# Altium PCB Quad FC V10.6.7.PcbDoc
Units mm, origin at the board's own origin, x right, y up, seen from the top; angles counter-clockwise.
Board outline 50 x 50 mm, 2 copper layers (Top Layer, Bottom Layer); 70 components, 50 nets, 277 pads, 3 vias.
Unrouted connection lines stored in the file: 93.
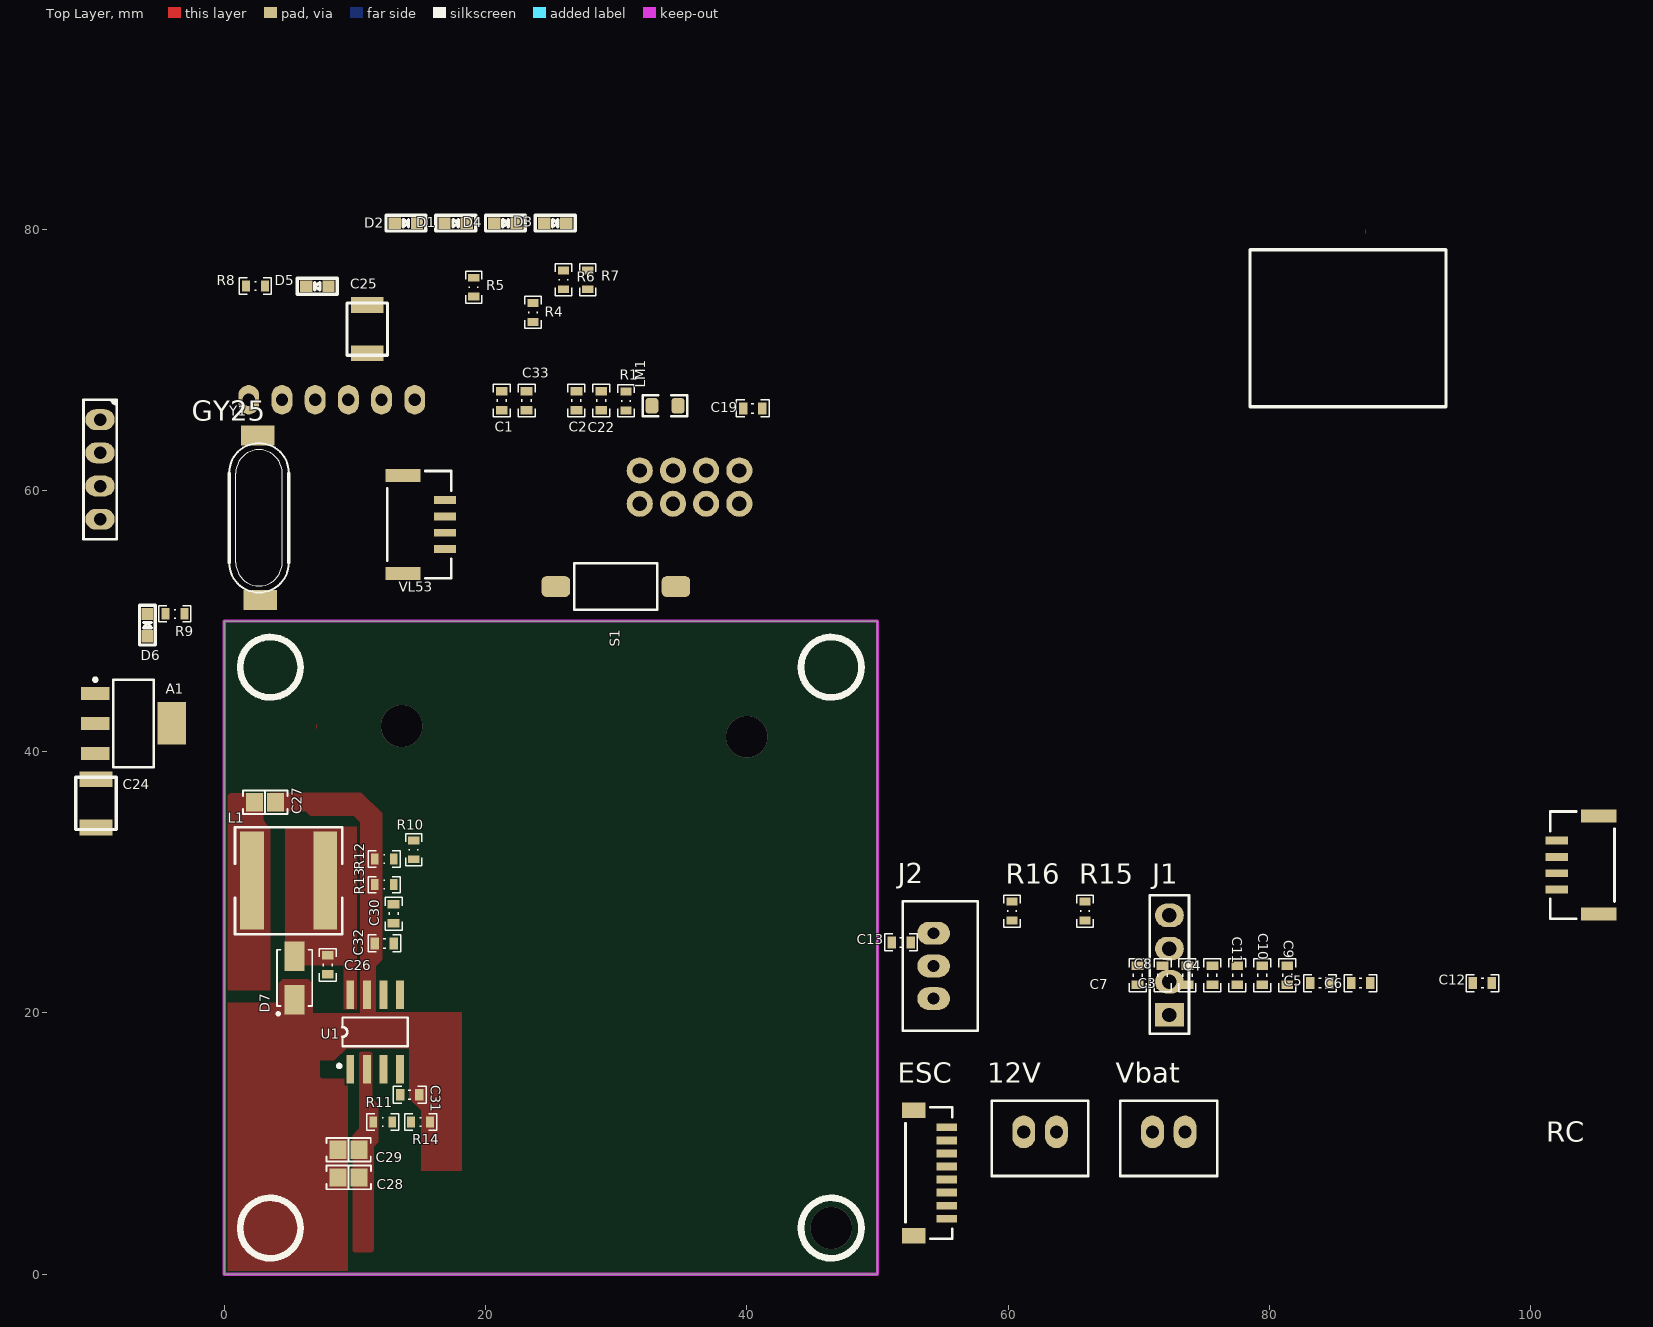
[diagram p0: Top Layer view]
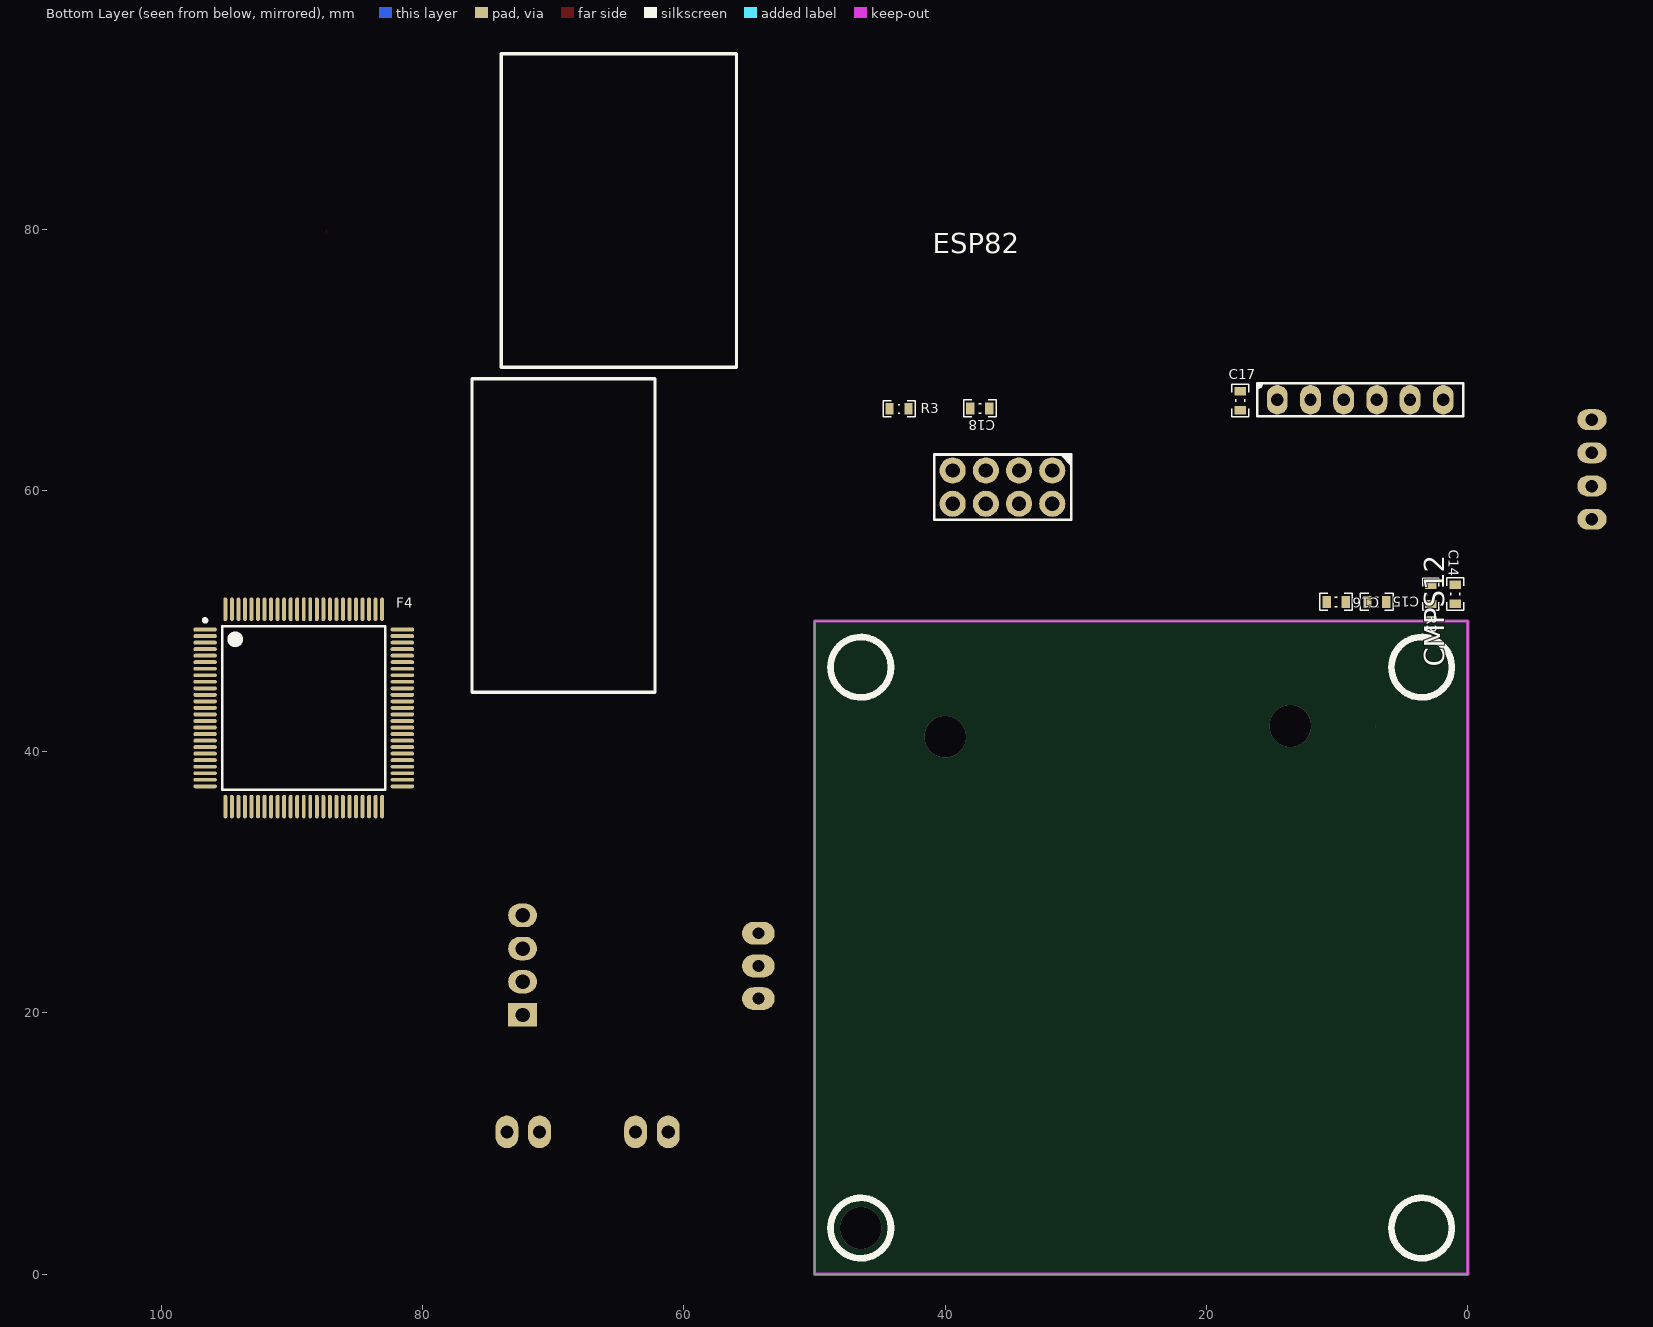
[diagram p1: Bottom Layer view, seen from below]

## Layer stack, top to bottom
Top Solder: solder mask 0.0102, Solder Resist, Dk 3.5
Top Layer: signal copper 0.0356
Dielectric 1: dielectric 0.32, FR-4, Dk 4.8
Bottom Layer: signal copper 0.0356
Bottom Solder: solder mask 0.0102, Solder Resist, Dk 3.5

## Board outline
0,0 50,0 50,50 0,50

## Design rules (kind name [scope] priority, off if disabled: settings)
Clearance [All] p1: gap=0.152 ignorepadtopadclearanceinfootprint=FALSE except(0: Arc-Hole Track-Hole SMDPad-Hole THPad-Hole Via-Hole Fill-Hole Poly-Hole Region-Hole Text-Hole)
DiffPairsRouting [All] p1: maxlimit=0.254 minlimit=0.254 mostfreqgap=0.254 toplayer_minwidth=0.381 toplayer_maxwidth=0.381 toplayer_prefwidth=0.381 bottomlayer_minwidth=0.381 bottomlayer_maxwidth=0.381 bottomlayer_prefwidth=0.381 maxuncoupledlength=12.7
HoleSize [All] p1: absolutevalues=TRUE maxlimit=10 minlimit=0.025 maxpercent=80.000 minpercent=20.000
PlaneConnect PlaneConnect_2 [All] p1: planeconnectstyle=Direct reliefexpansion=0.508 reliefentries=4 reliefconductorwidth=0.254 reliefairgap=0.254
PlaneConnect PlaneConnect_1 [All] p2: planeconnectstyle=Relief reliefexpansion=0.508 reliefentries=4 reliefconductorwidth=0.254 reliefairgap=0.254
PlaneConnect [All] p3: planeconnectstyle=Relief reliefexpansion=0.508 reliefentries=4 reliefconductorwidth=0.254 reliefairgap=0.254
PolygonConnect PolygonConnect_27 [All vs IsNamedPolygon('GND_L01_P011')] p1: connectstyle=Direct reliefconductorwidth=0.254 reliefentries=4 polygonreliefangle="90 Angle" airgapwidth=0.254
PolygonConnect PolygonConnect_26 [All vs IsNamedPolygon('NETC26_1_L01_P009')] p2: connectstyle=Direct reliefconductorwidth=0.254 reliefentries=4 polygonreliefangle="90 Angle" airgapwidth=0.254
PolygonConnect PolygonConnect_25 [All vs IsNamedPolygon('12V_L01_P010')] p3: connectstyle=Direct reliefconductorwidth=0.254 reliefentries=4 polygonreliefangle="90 Angle" airgapwidth=0.254
PolygonConnect PolygonConnect_24 [All vs IsNamedPolygon('VBAT+_L01_P008')] p4: connectstyle=Direct reliefconductorwidth=0.254 reliefentries=4 polygonreliefangle="90 Angle" airgapwidth=0.254
PolygonConnect PolygonConnect_23 [All vs IsNamedPolygon('NETC17_1_L01_P008')] p5: connectstyle=Direct reliefconductorwidth=0.254 reliefentries=4 polygonreliefangle="90 Angle" airgapwidth=0.254
PolygonConnect PolygonConnect_22 [All vs IsNamedPolygon('VBAT+_L01_P007')] p6: connectstyle=Direct reliefconductorwidth=0.254 reliefentries=4 polygonreliefangle="90 Angle" airgapwidth=0.254
PolygonConnect PolygonConnect_21 [All vs IsNamedPolygon('VBAT+_L01_P007')] p7: connectstyle=Direct reliefconductorwidth=0.254 reliefentries=4 polygonreliefangle="90 Angle" airgapwidth=0.254
PolygonConnect PolygonConnect_20 [All vs IsNamedPolygon('NONET_L01_P003')] p8: connectstyle=Direct reliefconductorwidth=0.254 reliefentries=4 polygonreliefangle="90 Angle" airgapwidth=0.254
PolygonConnect PolygonConnect_19 [All vs IsNamedPolygon('NONET_L01_P003')] p9: connectstyle=Direct reliefconductorwidth=0.254 reliefentries=4 polygonreliefangle="90 Angle" airgapwidth=0.254
PolygonConnect PolygonConnect_18 [All vs IsNamedPolygon('NONET_L01_P002')] p10: connectstyle=Direct reliefconductorwidth=0.254 reliefentries=4 polygonreliefangle="90 Angle" airgapwidth=0.254
PolygonConnect PolygonConnect_17 [All vs IsNamedPolygon('NONET_L01_P001')] p11: connectstyle=Direct reliefconductorwidth=0.254 reliefentries=4 polygonreliefangle="90 Angle" airgapwidth=0.254
PolygonConnect PolygonConnect_16 [All vs IsNamedPolygon('NETC37_1_L01_P000')] p12: connectstyle=Direct reliefconductorwidth=0.254 reliefentries=4 polygonreliefangle="90 Angle" airgapwidth=0.254
PolygonConnect PolygonConnect_15 [All vs IsNamedPolygon('GND_L02_P008')] p13: connectstyle=Direct reliefconductorwidth=0.254 reliefentries=4 polygonreliefangle="90 Angle" airgapwidth=0.254
PolygonConnect PolygonConnect_14 [All vs IsNamedPolygon('GND_L01_P007')] p14: connectstyle=Direct reliefconductorwidth=0.254 reliefentries=4 polygonreliefangle="90 Angle" airgapwidth=0.254
PolygonConnect PolygonConnect_13 [All vs IsNamedPolygon('GND_L02_P001') Or IsNamedPolygon('NONET_L02_P004')] p15: connectstyle=Direct reliefconductorwidth=0.254 reliefentries=4 polygonreliefangle="90 Angle" airgapwidth=0.254
PolygonConnect PolygonConnect_12 [All vs IsNamedPolygon('GND_L01_P006')] p16: connectstyle=Direct reliefconductorwidth=0.254 reliefentries=4 polygonreliefangle="90 Angle" airgapwidth=0.254
PolygonConnect PolygonConnect_11 [All vs IsNamedPolygon('GND_L01_P005')] p17: connectstyle=Direct reliefconductorwidth=0.254 reliefentries=4 polygonreliefangle="90 Angle" airgapwidth=0.254
PolygonConnect PolygonConnect_10 [All vs IsNamedPolygon('NETC37_1_L01_P002')] p18: connectstyle=Direct reliefconductorwidth=0.254 reliefentries=4 polygonreliefangle="90 Angle" airgapwidth=0.254
PolygonConnect PolygonConnect_9 [All vs IsNamedPolygon('MP1584-FB_L01_P005')] p19: connectstyle=Direct reliefconductorwidth=0.254 reliefentries=4 polygonreliefangle="90 Angle" airgapwidth=0.254
PolygonConnect PolygonConnect_8 [All vs IsNamedPolygon('GND_L02_P001')] p20: connectstyle=Direct reliefconductorwidth=0.254 reliefentries=4 polygonreliefangle="90 Angle" airgapwidth=0.254
PolygonConnect PolygonConnect_7 [All vs IsNamedPolygon('MP1584-FB_L01_P005')] p21: connectstyle=Direct reliefconductorwidth=0.254 reliefentries=4 polygonreliefangle="90 Angle" airgapwidth=0.254
PolygonConnect PolygonConnect_6 [All vs IsNamedPolygon('MP1584-FB_L01_P005')] p22: connectstyle=Direct reliefconductorwidth=0.254 reliefentries=4 polygonreliefangle="90 Angle" airgapwidth=0.254
PolygonConnect PolygonConnect_5 [All vs IsNamedPolygon('NONET_L02_P004')] p23: connectstyle=Direct reliefconductorwidth=0.254 reliefentries=4 polygonreliefangle="90 Angle" airgapwidth=0.254
PolygonConnect PolygonConnect_4 [All vs IsNamedPolygon('NETC34_1_L01_P003')] p24: connectstyle=Direct reliefconductorwidth=0.254 reliefentries=4 polygonreliefangle="90 Angle" airgapwidth=0.254
PolygonConnect PolygonConnect_3 [All vs IsNamedPolygon('NETC34_2_L01_P002')] p25: connectstyle=Direct reliefconductorwidth=0.254 reliefentries=4 polygonreliefangle="90 Angle" airgapwidth=0.254
PolygonConnect PolygonConnect_2 [All vs IsNamedPolygon('GND_L02_P001')] p26: connectstyle=Direct reliefconductorwidth=0.254 reliefentries=4 polygonreliefangle="90 Angle" airgapwidth=0.254
PolygonConnect PolygonConnect_1 [All vs IsNamedPolygon('VBAT+_L01_P000')] p27: connectstyle=Direct reliefconductorwidth=0.254 reliefentries=4 polygonreliefangle="90 Angle" airgapwidth=0.254
PolygonConnect [All] p28: connectstyle=Relief reliefconductorwidth=0.254 reliefentries=4 polygonreliefangle="90 Angle" airgapwidth=0.254
RoutingVias [All] p1: holewidth=0.3 width=0.4 viastyle="Through Hole" minholewidth=0.254 minwidth=0.254 maxholewidth=5 maxwidth=5
SilkToSilkClearance [All] p1: silktosilkclearance=0.152
SolderMaskExpansion [IsVia  and not Locked] p1: expansion=0.051 istentingtop=TRUE
Width 12V [InNet('12V')] p1: maxlimit=1.016 minlimit=0.254 preferedwidth=0.508
Width 3V3 [InNet('3V3')] p2: maxlimit=1.016 minlimit=0.254 preferedwidth=0.508
Width [All] p3: maxlimit=1.524 minlimit=0.152 preferedwidth=0.508
26 further rules are at their usual default settings.

## Classes and differential pairs
component class "Quad FC power V10.6": 12V A1 C24 C25 C26 C27 C28 C29 C30 C31 C32 D5 D6 D7 ESC L1 R8 R9 R10 R11 R12 R13 R14 U1 Vbat
component class "Quad FC V10.6": -- C1 C2 C3 C4 C5 C6 C7 C8 C9 C10 C11 C12 C13 C14 C15 C16 C17 C18 C19 C22 C33 CMPS12 D1 D2 D3 D4 ESP82 F4 GY25 J1 J2 LM1 R1 R2 R3 R4 R5 R6 R7 R15 R16 RC S1 VL53 Y1
differential pair F407_OSC: +F407_OSC_P -F407_OSC_N

## Components (designator, comment, footprint, x,y, rotation, side; value= is the part's Value field where it differs from the comment)
12V "Jetson Power" "JST XH B2B-XH-A" 62.45,10.9 r0 top
A1 "3.3V linear regulator" SOT230P700X180-4N -6.94,42.16 r0 top
C1 "100nF" CAP0603 21.238,66.873 r90 top
C2 "1uF" CAP0603 26.962,66.873 r90 top
C3 "100nF" CAP0603 73.732,22.89 r270 top
C4 "100nF" CAP0603 75.64,22.89 r270 top
C5 "100nF" CAP0603 83.872,22.29 r0 top
C6 "100nF" CAP0603 86.98,22.29 r0 top
C7 "100nF" CAP0603 69.916,22.89 r90 top
C8 "1uF" CAP0603 71.824,22.89 r90 top
C9 "100nF" CAP0603 81.364,22.89 r90 top
C10 "4.7uF" CAP0603 79.456,22.89 r90 top
C11 "100nF" CAP0603 77.548,22.89 r90 top
C12 "100nF" CAP0603 96.304,22.29 r180 top
C13 "100nF" CAP0603 51.808,25.398 r180 top
C14 "100nF" CAP0603 0.954,52.062 r90 bottom
C15 "10pF" CAP0603 6.975,51.462 r180 bottom
C16 "10pF" CAP0603 10.083,51.462 r0 bottom
C17 "2.2uF" CAP0603 17.422,66.873 r270 bottom
C18 "2.2uF" CAP0603 37.344,66.273 r0 bottom
C19 "100nF" CAP0603 40.452,66.273 r180 top
C22 "100nF" CAP0603 28.87,66.873 r270 top
C24 "10uF" MY_CAP_SMD-B -9.81,36.04 r270 top value=3300u
C25 "100uF" MY_CAP_SMD-B 10.95,72.34 r90 top value=3300u
C26 "100nF" CAP0603 7.93,23.68 r270 top
C27 "10 µF" "CAP 0805_2012" 3.14,36.12 r180 top
C28 "10 µF" "CAP 0805_2012" 9.53,7.41 r0 top
C29 "10 µF" "CAP 0805_2012" 9.52,9.53 r0 top
C30 "1nF" CAP0603 12.97,27.6 r90 top
C31 "8.2nF" CAP0603 14.2,13.74 r0 top
C32 "10pF" CAP0603 12.26,25.32 r180 top
C33 "100nF" CAP0603 23.146,66.873 r90 top
CMPS12 "CMPS12" "SAMTEC SSW-106-03-T-S" 8.234,66.943 r180 bottom
D1 "LED" "0603 - LED" 17.721,80.457 r0 top
D2 "LED" "0603 - LED" 13.911,80.457 r0 top
D3 "LED" "0603 - LED" 25.341,80.457 r0 top
D4 "LED" "0603 - LED" 21.531,80.457 r0 top
D5 "LED" "0603 - LED" 7.13,75.63 r180 top
D6 "LED" "0603 - LED" -5.872,49.687 r90 top
D7 "1n5822" DIOM4226X244N 5.39,22.69 r90 top
ESC "ESC" "JST BM08B-SRSS-TB" 54.05,7.75 r90 top
ESP82 "ESP82" "HARWIN M20-7830445" 35.62,60.25 r270 bottom
F4 "STM32F407VGT6" STM-LQFP100_N 89.1,43.35 r180 bottom
GY25 "GY25" "SAMTEC SSW-104-03-T-S" -9.5,61.6 r270 top
J1 "Programming Pin" "HEADER 4X1" 72.35,19.85 r90 top
J2 "Jetson Uart connector" "JST XH B3B-XH-A" 54.3,23.6 r90 top
L1 "10 µH" "TAIYO YUDEN NRS8030" 4.93,30.13 r180 top
LM1 "10uH" 0805L 33.736,66.473 r180 top value=FB805
R1 "0" RES0603 30.753,66.848 r90 top
R2 "1K" RES0603 2.837,52.037 r90 bottom
R3 "1K" RES0603 43.535,66.248 r180 bottom
R4 "1K" RES0603 23.63,73.62 r270 top
R5 "1K" RES0603 19.1,75.555 r270 top
R6 "1K" RES0603 25.971,76.117 r270 top
R7 "1K" RES0603 27.829,76.117 r270 top
R8 "1K" RES0603 2.39,75.64 r180 top
R9 "1K" RES0603 -3.772,50.557 r0 top
R10 "10.2k" RES0603 14.51,32.49 r90 top
R11 "0.732k" RES0603 12.14,11.65 r180 top
R12 "0.732k" RES0603 12.25,31.79 r0 top
R13 "36.5K" RES0603 12.25,29.82 r0 top value=36.5k
R14 "0.732k" RES0603 15.035,11.65 r180 top
R15 "0" RES0603 65.9,27.8 r90 top
R16 "0" RES0603 60.3,27.8 r90 top
RC "Radio Controller" "JST SM04B-GHS-TB" 103.875,31.325 r270 top
S1 "FSMSMTR" "TE FSMSMTR" 29.984,52.64 r90 top
U1 "TPS54331" SO8 11.56,18.55 r0 top
Vbat "FC power" "JST XH B2B-XH-A" 72.3,10.9 r0 top
VL53 "VL53L0" "JST SM04B-GHS-TB" 15.02,57.38 r90 top
Y1 "CRYSTAL_SMD" "My_Crystal - SMD" 2.667,57.901 r90 top

## Footprints (in the part's own frame and the unit in brackets; to place one, negate y for a bottom-side part, rotate by r counter-clockwise, add the part's x,y. Pads: shape width x height; smd on the part's side, far side on the other; paste and mask are expansions set on the pad)
"0603 - LED" [mil]
  rect 37x35 smd: 1(-33.5,0) 2(33.5,0)
  silkscreen extent -60,-24 60,24, body extent -32,-16 32,16, height 43
0805L [mm] ",0805, 2012, 200X130"
  rrect50% 1x1.2 smd mask+0.075: 1(-1,0) 2(1,0)
  Top Layer pour cut-out: -0.5,0.8 0.5,0.8 0.5,-0.8 -0.5,-0.8
  silkscreen extent -1.7,-0.8 1.7,0.8, body extent -1,-0.6 1,0.6, height 0.95
CAP0603 [mm] "Chip Capacitor, 2-Leads, Body 1/60x0/80mm, IPC Medium Density DESIGNER:ABBAS BASEREH"
  rect 0.65x0.9 smd: 1(-0.725,0) 2(0.725,0)
  silkscreen extent -1.25,-0.65 1.25,0.65, body extent -0.82,-0.43 0.82,0.43, height 0.4
"CAP 0805_2012" [mm] "Chip Capacitor, 2-Leads, Body 2.00x1.20mm, IPC Medium Density"
  rect 1.3x1.4 smd: 1(-0.8,0) 2(0.8,0)
  silkscreen extent -1.7,-0.9 1.7,0.9, body extent -1,-0.64 1,0.64, height 1.26
DIOM4226X244N [mm]
  rect 2.26x1.51 smd: 1(-1.67,0) 2(1.67,0)
  silkscreen extent -2.85,-1.35 2.15,1.35, body extent -2.6,-1.36 2.6,1.36, height 1.19
"HARWIN M20-7830445" [mm] "2.54mm DIL PC TAIL PIN HEADER ASSEMBLY"
  round 2 hole 1.1: 1(-1.27,3.81) 2(-1.27,1.27) 3(-1.27,-1.27) 4(-1.27,-3.81) 5(1.27,-3.81) 6(1.27,-1.27) 7(1.27,1.27) 8(1.27,3.81)
  silkscreen extent -2.5,-5.23 2.5,5.27, body extent -2.52,-5.28 2.52,5.28, height 8.5
"HEADER 4X1" [mm]
  rect 1.8x2.2 hole 1.1: 1(0,0)
  oval 1.8x2.2 hole 1.1: 2(2.54,0) 3(5.08,0) 4(7.62,0)
  silkscreen extent -1.43,-1.5 9.18,1.5, body extent -1.19,-1.22 8.97,1.32, height 8.38
"JST BM08B-SRSS-TB" [mm] "1.0mm pitch/Disconnectable Crimp style connector"
  rect 0.6x1.55 smd: 1(-3.5,-1.262) 2(-2.5,-1.262) 3(-1.5,-1.262) 4(-0.5,-1.262) 5(0.5,-1.262) 6(1.5,-1.262) 7(2.5,-1.262) 8(3.5,-1.262)
  rect 1.2x1.8 smd: M(-4.8,1.262) M(4.8,1.262)
  silkscreen extent -5.03,-1.68 5.03,1.91, body extent -5,-1.69 5,1.91, height 4.32
"JST SM04B-GHS-TB" [mm] "1.25mm pitch/Disconnectable Crimp style connectors"
  rect 0.6x1.7 smd: 1(-1.875,-1.875) 2(-0.625,-1.875) 3(0.625,-1.875) 4(1.875,-1.875)
  rect 1x2.7 smd: M(-3.75,1.325) M(3.75,1.325)
  silkscreen extent -4.1,-2.37 4.1,2.54, body extent -4.12,-2.31 4.13,2.54, height 4.35
"JST XH B2B-XH-A" [mm]
  oval 1.75x2.5 hole 1: 1(-1.25,0) 2(1.25,0)
  silkscreen extent -3.7,-3.38 3.7,2.38, body extent -3.7,-3.38 3.7,2.38, height 7
"JST XH B3B-XH-A" [mm]
  oval 1.75x2.5 hole 0.9: 1(-2.5,0) 2(0,0) 3(2.5,0)
  silkscreen extent -4.95,-3.38 4.95,2.38, body extent -4.95,-3.38 4.95,2.38, height 7
MY_CAP_SMD-B [mm] "3.1X4"
  rect 1.2x2.5 smd: +(-1.845,0) -(1.845,0)
  silkscreen extent -2,-1.55 2,1.55, body extent -1.85,-1.41 1.85,1.41, height 2.14
"My_Crystal - SMD" [mil]
  rect 60x100 smd: 1(-247.06,-3.93) 2(248.03,3.94)
  silkscreen extent -225,-90 225,90, body extent -247,-98 245,91, height 154
RES0603 [mm] "Chip Resistor, 2-Leads, Body 1/60x0/80mm, IPC Medium Density DESIGNER:ABBAS BASEREH"
  rect 0.6x0.85 smd: 1(-0.725,0) 2(0.725,0)
  silkscreen extent -1.23,-0.63 1.23,0.62, body extent -0.82,-0.43 0.82,0.43, height 0.4
"SAMTEC SSW-104-03-T-S" [mm]
  oval 1.6x2.25 hole 0.95: 1(-3.81,0) 2(-1.27,0) 3(1.27,0) 4(3.81,0)
  silkscreen extent -5.34,-1.27 5.34,1.27, body extent -5.33,-1.21 5.33,1.21, height 8.51
"SAMTEC SSW-106-03-T-S" [mm]
  oval 1.6x2.25 hole 0.95: 1(-6.35,0) 2(-3.81,0) 3(-1.27,0) 4(1.27,0) 5(3.81,0) 6(6.35,0)
  silkscreen extent -7.88,-1.27 7.88,1.27, body extent -7.87,-1.21 7.87,1.21, height 8.51
SO8 [mm]
  rect 0.6x2.2 smd: 1(-1.905,-2.854) 2(-0.635,-2.854) 3(0.635,-2.854) 4(1.905,-2.854) 5(1.905,2.854) 6(0.635,2.854) 7(-0.635,2.854) 8(-1.905,2.854)
  silkscreen extent -2.88,-2.72 2.5,1.1, body extent -2.46,-2.79 2.44,2.98, height 1.45
SOT230P700X180-4N [mm] "SOT223, 4-Leads, Body 6.50x7.00mm (avg), Pitch 2.30mm, IPC Medium Density"
  rect 2.15x1 smd: 1(-2.925,2.3) 2(-2.925,0) 3(-2.925,-2.3)
  rect 2.15x3.25 smd: 4(2.925,0)
  silkscreen extent -3.05,-3.35 1.55,3.47, body extent -1.85,-3.35 1.85,3.35, height 1.8
STM-LQFP100_N [mm] "Thin QFP, 100-Leads, Body 14x14mm, Pitch 0.5mm, IPC Medium Density"
  oval 1.8x0.3 smd: 1(-7.55,6) 2(-7.55,5.5) 3(-7.55,5) 4(-7.55,4.5) 5(-7.55,4) 6(-7.55,3.5) 7(-7.55,3) 8(-7.55,2.5) 9(-7.55,2) 10(-7.55,1.5) 11(-7.55,1) 12(-7.55,0.5) 13(-7.55,0) 14(-7.55,-0.5) 15(-7.55,-1) 16(-7.55,-1.5) 17(-7.55,-2) 18(-7.55,-2.5) 19(-7.55,-3) 20(-7.55,-3.5) 21(-7.55,-4) 22(-7.55,-4.5) 23(-7.55,-5) 24(-7.55,-5.5) 25(-7.55,-6) 51(7.55,-6) 52(7.55,-5.5) 53(7.55,-5) 54(7.55,-4.5) 55(7.55,-4) 56(7.55,-3.5) 57(7.55,-3) 58(7.55,-2.5) 59(7.55,-2) 60(7.55,-1.5) 61(7.55,-1) 62(7.55,-0.5) 63(7.55,0) 64(7.55,0.5) 65(7.55,1) 66(7.55,1.5) 67(7.55,2) 68(7.55,2.5) 69(7.55,3) 70(7.55,3.5) 71(7.55,4) 72(7.55,4.5) 73(7.55,5) 74(7.55,5.5) 75(7.55,6)
  oval 0.3x1.8 smd: 26(-6,-7.55) 27(-5.5,-7.55) 28(-5,-7.55) 29(-4.5,-7.55) 30(-4,-7.55) 31(-3.5,-7.55) 32(-3,-7.55) 33(-2.5,-7.55) 34(-2,-7.55) 35(-1.5,-7.55) 36(-1,-7.55) 37(-0.5,-7.55) 38(0,-7.55) 39(0.5,-7.55) 40(1,-7.55) 41(1.5,-7.55) 42(2,-7.55) 43(2.5,-7.55) 44(3,-7.55) 45(3.5,-7.55) 46(4,-7.55) 47(4.5,-7.55) 48(5,-7.55) 49(5.5,-7.55) 50(6,-7.55) 76(6,7.55) 77(5.5,7.55) 78(5,7.55) 79(4.5,7.55) 80(4,7.55) 81(3.5,7.55) 82(3,7.55) 83(2.5,7.55) 84(2,7.55) 85(1.5,7.55) 86(1,7.55) 87(0.5,7.55) 88(0,7.55) 89(-0.5,7.55) 90(-1,7.55) 91(-1.5,7.55) 92(-2,7.55) 93(-2.5,7.55) 94(-3,7.55) 95(-3.5,7.55) 96(-4,7.55) 97(-4.5,7.55) 98(-5,7.55) 99(-5.5,7.55) 100(-6,7.55)
  silkscreen extent -7.68,-6.25 6.25,6.82, body extent -7,-7 7,7, height 1.6
"TAIYO YUDEN NRS8030" [mm] "Precision Wire Wound Inductor, 2-Leads, Body 8.00x8.00mm, IPC Medium Density"
  rect 1.8x7.5 smd: 1(-2.8,0) 2(2.8,0)
  silkscreen extent -4.1,-4.1 4.1,4.1, body extent -4,-4 4,4, height 3
"TE FSMSMTR" [mm]
  rrect50% 1.6x2.19 smd: 1(0,4.595) 2(0,-4.595)
  silkscreen extent -1.78,-3.17 1.78,3.17, body extent -1.75,-4.98 1.75,4.98, height 4.42

## Part data
12V Vbat: library part B2B-XH-A(LF)(SN), "CONN HEADER VERT 2POS 2.5MM", Current Rating (Amps)=3A, Insulation Color=Natural, Manufacturer="JST Sales America Inc.", Material Flammability Rating="UL94 V-0", Operating Temperature="-25°C ~ 85°C", Supplier Part Number 1=455-2247-ND, Voltage Rating=250V, ComponentLink1Description=Datasheet, ComponentLink1URL=http://www.jst-mfg.com/product/pdf/eng/eXH.pdf, ComponentLink2Description="DigiKey Link", ComponentLink2URL=http://digikey.com/product-detail/en/jst-sales-america-inc/B2B-XH-A-LF-SN/455-2247-ND/1651045, Connector Type=Header, Contact Finish - Mating=Tin, Contact Finish - Post=Tin, Contact Length - Post="0.134\" (3.40mm)", Contact Material=Brass, Contact Shape=Square, Contact Type="Male Pin", Fastening Type="Detent Lock", Insulation Height="0.276\" (7.00mm)", Insulation Material="Polyamide (PA66), Nylon 6/6", LastUpdated="1/12/2020 11:46:08 PM", Lifecycle Status=Active, Minimum Order=1, Mounting Type="Through Hole", Number of Positions=2, Number of Positions Loaded=All, Number of Rows=1, Packaging=Bulk, Part Number=B2B-XH-A(LF)(SN), Part Status=Active, partid=67, Pitch - Mating="0.098\" (2.50mm)", Price=0.15, Series=XH, Shrouding="Shrouded - 4 Wall", Style="Board to Cable/Wire", Supplier 1=DigiKey, Termination="Press-Fit, Solder"
A1: library part ams1117
C1 C2 C3 C4 C5 C6 C7 C8 C9 C10 C11 C12 C13 C14 C15 C16 C17 C18 C19 C22 C26 C30 C31 C32 C33: library part "CAP SMD PACKAGE", "F407VET6 Power CAP", Data=2017-3-10, Desc.="CAP SMD TOTAL PACKAGES", Designer="Abbas Basereh"
C24 C25: library part CAP_TANTAL_B, "3.5X2.8MM"
C27 C28 C29: library part GRM21BR61H106KE43K, "CAP CER 10UF 50V X5R 0805", Device Package="0805 (2012 Metric)", Manufacturer="Murata Electronics", Operating Temperature="-55°C ~ 85°C", Supplier Part Number 1=490-GRM21BR61H106KE43KCT-ND, Temperature Coefficient=X5R, Tolerance=±10%, Voltage - Rated=50V, Applications="General Purpose", Capacitance="10 µF", ComponentLink1Description=Datasheet, ComponentLink1URL=https://search.murata.co.jp/Ceramy/image/img/A01X/G101/ENG/GRM21BR61H106KE43-01A.pdf, ComponentLink2Description="DigiKey Link", ComponentLink2URL=https://www.digikey.com/en/products/detail/murata-electronics/GRM21BR61H106KE43K/15191954, LastUpdated="2/9/2024 8:15:01 PM", Lifecycle Status=Active, Minimum Order=1, Mounting Type="Surface Mount, MLCC", Package / Case="0805 (2012 Metric)", Packaging=TapeAndReel, Part Number=GRM21BR61H106KE43K, Part Status=Active, partid=40508, Price=0.05, Series=GRM, Size / Dimension="0.079\" L x 0.049\" W (2.00mm x 1.25mm)", Supplier 1=DigiKey, Thickness (Max)="0.057\" (1.45mm)"
CMPS12: library part SSW-106-03-T-S, "CONN RCPT 6POS 0.1 TIN PCB", Current Rating (Amps)="5.7A per Contact", Insulation Color=Black, Manufacturer="Samtec Inc.", Material Flammability Rating="UL94 V-0", Operating Temperature="-55°C ~ 105°C", Supplier Part Number 1=SAM8865-ND, ComponentLink1Description=Datasheet, ComponentLink1URL=http://suddendocs.samtec.com/prints/ssw-s.pdf, ComponentLink2Description="DigiKey Link", ComponentLink2URL=https://www.digikey.com/en/products/detail/samtec-inc/SSW-106-03-T-S/1790202, Connector Type=Receptacle, Contact Finish - Mating=Tin, Contact Finish - Post=Tin, Contact Length - Post="0.394\" (10.00mm)", Contact Type=Forked, Fastening Type=Push-Pull, Insulation Height="0.335\" (8.51mm)", LastUpdated="6/21/2022 3:09:22 PM", Lifecycle Status=Active, Minimum Order=1, Mounting Type="Through Hole", Number of Positions=6, Number of Positions Loaded=All, Number of Rows=1, Packaging=Bulk, Part Number=SSW-106-03-T-S, Part Status=Active, Pitch - Mating="0.100\" (2.54mm)", Price=0.55, Series=SSW, Style="Board to Board or Cable", Supplier 1=DigiKey, Termination=Solder
D1 D2 D3 D4 D5 D6: "Led", LatestRevisionDate=08-Jul-2005, LatestRevisionNote="Mech Layer 1 removed.", PackageReference=LED-0, Published=8-Jun-2000, Publisher="Altium Limited"
D7: library part "1n5822 SMD", "Schottky Rectifiers", Manufacturer="ON Semiconductor/Fairchild", Data=16-12-2016, Designer="Abbas Basereh", Link=https://www.aliexpress.com/item/Free-shipping-100pcs-1n5822-sma-smd-do-214ac-Schottky-diode-ss34/32337482329.html?spm=2114.01010208.3.1.zLZDsP&ws_ab_test=searchweb0_0,searchweb201602_4_10065_10068_10084_10083_10080_10082_10081_10060_10061_10062_10056_10055_10054_10059_10099_10078_10079_427_10073_10103_10102_10096_10052_10050_10051,searchweb201603_4&btsid=6e50dc92-ac69-45bc-a19e-209af19ce602, Part. No=SS34
ESC: library part BM08B-SRSS-TBT(LF)(SN), "CONN HEADER SMD 8POS 1MM", Part Number=BM08B-SRSS-TBT(LF)(SN)
ESP82: library part M20-7830442, "CONN RCPT 8POS 0.1 GOLD PCB", Current Rating (Amps)=3A, Insulation Color=Black, Manufacturer="Harwin Inc.", Material Flammability Rating="UL94 V-0", Operating Temperature="-40°C ~ 105°C", Supplier Part Number 1=952-1789-ND, ComponentLink1Description=Datasheet, ComponentLink1URL=https://cdn.harwin.com/pdfs/C001XX_M20_Series_Connectors.pdf, ComponentLink2Description="DigiKey Link", ComponentLink2URL=http://digikey.com/product-detail/en/harwin-inc/M20-7830442/952-1789-ND/3727758, Connector Type=Receptacle, Contact Finish - Mating=Gold, Contact Finish - Post=Tin, Contact Finish Thickness - Mating=Flash, Contact Length - Post="0.118\" (3.00mm)", Contact Type="Female Socket", Fastening Type=Push-Pull, Insulation Height="0.335\" (8.51mm)", LastUpdated="9/21/2022 7:04:26 PM", Lifecycle Status=Active, Mated Stacking Heights="11.04mm, 12.63mm", Minimum Order=1, Mounting Type="Through Hole", Number of Positions=8, Number of Positions Loaded=All, Number of Rows=2, Packaging=Tube, Part Number=M20-7830442, Part Status=Active, Pitch - Mating="0.100\" (2.54mm)", Price=1.36, Row Spacing - Mating="0.100\" (2.54mm)", Series=M20, Style="Board to Board or Cable", Supplier 1=DigiKey, Termination=Solder
F4: "ARM Cortex-M4 32-bit MCU+FPU, 210 DMIPS, 1024 kB Flash, 192 kB Internal RAM, 82 I/Os, 100-pin LQFP, -40 to 85 degC, Tray", I/Os (High Current)=82, Manufacturer=STMicroelectronics, Operating Frequency(F) (Processor speed) (MHz)=168, Supplier Part Number 1=497-11605-ND, Supply Voltage(Vcc) max (V)=3.6, Supply Voltage(Vcc) min (V)=1.8, ComponentLink1Description="Manufacturer URL", ComponentLink1URL=http://www.st.com/web/en/home.html, ComponentLink2Description=Datasheet, ComponentLink2URL=http://www.st.com/st-web-ui/static/active/en/resource/technical/document/datasheet/DM00037051.pdf, ComponentLink3Description="Package Specification", ComponentLink3URL=http://www.st.com/st-web-ui/static/active/en/resource/technical/document/data_brief/DM00071938.pdf, Core="ARM Cortex-M4", D/A Converter=2x12-bit, DatasheetVersion="Rev. 4", FLASH Size (Prog) (kB)=1024, Internal RAM Size (kB)=192, Mounting Technology="Surface Mount", PackageDescription="100-Pin Low Profile Quad Flat Package, 14 x 14 mm Body, 0.5 mm Pitch", PackageReference=LQFP100, PackageVersion="Rev. 1, 06/2013", Packing=Tray, PartNumber=STM32F407VGT6, Supplier 1=Digi-Key, Supplier 2=Farnell, Supplier 3=Newark, Supplier 4=Mouser, Supplier Part Number 2=2064368, Supplier Part Number 3=73T2333, Supplier Part Number 4=511-STM32F407VGT6
GY25: library part SSW-104-03-T-S, "CONN RCPT 4POS 0.1 TIN PCB", Current Rating (Amps)="5.7A per Contact", Insulation Color=Black, Manufacturer="Samtec Inc.", Material Flammability Rating="UL94 V-0", Operating Temperature="-55°C ~ 105°C", Supplier Part Number 1=SSW-104-03-T-S-ND, ComponentLink2Description="DigiKey Link", ComponentLink2URL=http://digikey.com/product-detail/en/samtec-inc/SSW-104-03-T-S/SSW-104-03-T-S-ND/7874034, Connector Type=Receptacle, Contact Finish - Mating=Tin, Contact Finish - Post=Tin, Contact Type=Forked, Fastening Type=Push-Pull, LastUpdated="6/21/2022 3:08:52 PM", Lifecycle Status=Active, Minimum Order=1, Mounting Type="Through Hole", Number of Positions=4, Number of Positions Loaded=All, Number of Rows=1, Packaging=Bulk, Part Number=SSW-104-03-T-S, Part Status=Active, Price=0.83, Series=SSW, Style="Board to Board or Cable", Supplier 1=DigiKey, Termination=Solder
J1: library part Header4X1
J2: library part B3B-XH-A(LF)(SN), "CONN HEADER VERT 3POS 2.5MM", Current Rating (Amps)=3A, Insulation Color=Natural, Manufacturer="JST Sales America Inc.", Material Flammability Rating="UL94 V-0", Operating Temperature="-25°C ~ 85°C", Supplier Part Number 1=455-2248-ND, Voltage Rating=250V, ComponentLink1Description=Datasheet, ComponentLink1URL=http://www.jst-mfg.com/product/pdf/eng/eXH.pdf, ComponentLink2Description="DigiKey Link", ComponentLink2URL=http://digikey.com/product-detail/en/jst-sales-america-inc/B3B-XH-A-LF-SN/455-2248-ND/1651046, Connector Type=Header, Contact Finish - Mating=Tin, Contact Finish - Post=Tin, Contact Length - Post="0.134\" (3.40mm)", Contact Material=Brass, Contact Shape=Square, Contact Type="Male Pin", Fastening Type="Detent Lock", Insulation Height="0.276\" (7.00mm)", Insulation Material="Polyamide (PA66), Nylon 6/6", LastUpdated="1/12/2020 11:46:22 PM", Lifecycle Status=Active, Minimum Order=1, Mounting Type="Through Hole", Number of Positions=3, Number of Positions Loaded=All, Number of Rows=1, Packaging=Bulk, Part Number=B3B-XH-A(LF)(SN), Part Status=Active, partid=68, Pitch - Mating="0.098\" (2.50mm)", Price=0.19, Series=XH, Shrouding="Shrouded - 4 Wall", Style="Board to Cable/Wire", Supplier 1=DigiKey, Termination="Press-Fit, Solder"
L1: library part NRS8030T100MJGJV, "FIXED IND 10UH 3A 42.9 MOHM SMD", Current - Saturation=2.4A, Current Rating (Amps)="3 A", DC Resistance (DCR)="42.9mOhm Max", Device Package=Nonstandard, Frequency - Self Resonant=27MHz, Inductance Frequency - Test="100 kHz", Manufacturer="Taiyo Yuden", Operating Temperature="-40°C ~ 125°C", Ratings=AEC-Q200, Supplier Part Number 1=587-3647-1-ND, Tolerance=±20%, ComponentLink1Description=Datasheet, ComponentLink1URL="https://ds.yuden.co.jp/TYCOMPAS/ut/detail?pn=NRS8030T100MJGJV  &u=M", ComponentLink2Description="DigiKey Link", ComponentLink2URL=https://www.digikey.com/en/products/detail/taiyo-yuden/NRS8030T100MJGJV/4693986, Height - Seated (Max)="0.118\" (3.00mm)", Inductance="10 µH", LastUpdated="2/8/2024 9:55:48 PM", Lifecycle Status=Active, Material - Core=Ferrite, Minimum Order=1, Mounting Type="Surface Mount", Package / Case=Nonstandard, Packaging=TapeAndReel, Part Number=NRS8030T100MJGJV, Part Status=Active, partid=5482, Price=0.23, Series="NR, S Type", Shielding=Shielded, Size / Dimension="0.315\" L x 0.315\" W (8.00mm x 8.00mm)", Supplier 1=DigiKey, Type="Drum Core, Wirewound"
LM1: library part "L SMA 0.25W", "Inductor", Code_IEC=1005, Code_JEITA=0402, LatestRevisionDate=29-May-2009, LatestRevisionNote="IPC-7351 Footprint Added.", PackageDescription="Chip Inductor", PackageReference=0402-A, Published=8-Jun-2000, Publisher="Altium Limited"
R1 R2 R3 R4 R5 R6 R7 R8 R9 R10 R11 R12 R13 R14 R15 R16: library part "RES SMD PACKAGE", "TOTAL SMD RESISTOR PACK", Data=2017-3-10, Desc.="RES SMD PAKAGES", Designer="Abbas Basereh"
RC VL53: library part SM04B-GHS-TB(LF)(SN)-, "CONN HEADER SMD R/A 4POS 1.25MM", Current Rating (Amps)=1A, Insulation Color=Natural, Manufacturer="JST Sales America Inc.", Material Flammability Rating="UL94 V-0", Operating Temperature="-25°C ~ 85°C", Supplier Part Number 1=455-1566-1-ND, Voltage Rating=50V, ComponentLink1Description=Datasheet, ComponentLink1URL=http://www.jst-mfg.com/product/pdf/eng/eGH.pdf, ComponentLink2Description="DigiKey Link", ComponentLink2URL=http://digikey.com/product-detail/en/jst-sales-america-inc/SM04B-GHS-TB-LF-SN/455-1566-1-ND/807834, Connector Type=Header, Contact Finish - Mating=Tin, Contact Finish - Post=Tin, Contact Material="Phosphor Bronze", Contact Shape=Rectangular, Contact Type="Outer Shroud Contact", Fastening Type="Locking Ramp", Features="Solder Retention", Insulation Height="0.167\" (4.25mm)", Insulation Material="Polyamide (PA9T), Nylon 9T", LastUpdated="1/12/2020 11:37:43 PM", Lifecycle Status=Active, Minimum Order=1, Mounting Type="Surface Mount, Right Angle", Number of Positions=4, Number of Positions Loaded=All, Number of Rows=1, Packaging=TapeAndReel, Part Number=SM04B-GHS-TB(LF)(SN)-, Part Status=Active, partid=55, Pitch - Mating="0.049\" (1.25mm)", Price=0.21, Series=GH, Shrouding="Shrouded - 4 Wall", Style="Board to Cable/Wire", Supplier 1=DigiKey, Termination=Solder
S1: "SWITCH TACTILE SPST-NO 0.05A 24V", Contact Rating @ Voltage="0.05A @ 24VDC", Manufacturer="TE Connectivity ALCOSWITCH Switches", Operating Force=180gf, Operating Temperature="-35°C ~ 85°C", Supplier Part Number 1=450-1758-1-ND, Actuator Height off PCB, Vertical=4.57mm, Actuator Orientation="Top Actuated", Actuator Type=Standard, Circuit=SPST-NO, ComponentLink1Description=Datasheet, ComponentLink1URL=https://www.te.com/commerce/DocumentDelivery/DDEController?Action=srchrtrv&DocNm=1437566-3&DocType=Customer+Drawing&DocLang=English, ComponentLink2Description="DigiKey Link", ComponentLink2URL=https://www.digikey.com/en/products/detail/te-connectivity-alcoswitch-switches/FSMSMTR/529671, Illumination=Non-Illuminated, LastUpdated="2/8/2024 9:49:52 PM", Lifecycle Status=Active, Minimum Order=1, Mounting Type="Surface Mount", Outline="6.00mm x 3.50mm", Packaging=TapeAndReel, Part Number=FSMSMTR, Part Status=Active, Price=0.20, Series=FSMSM, Supplier 1=DigiKey, Switch Function=Off-Mom, Termination Style="Gull Wing"
U1: "DC/DC Switching Regulators 2A,28V,1MHz Step Down SWIFT DC/D;Output Voltage:0.8 V to 25 V", Link=http://javanelec.com/productsDetails.aspx?id=33786
Y1: "Crystal"

## Via types
v1: diameter 3.2, hole 3.2, Top Layer to Bottom Layer, 3 vias

## Nets (pads, with @x,y where several pads share a name; then routed paths per layer and width w, separated by ;. In a path a pad name is that pad's centre, name@x,y a point inside that pad or via, vN(x,y) a via of type N, cw(c..) or ccw(c..) an arc to the next point about the centre after c; other vN are vias at no path point)
3V3: A1.2 A1.4 C3.2 C4.2 C5.2 C6.2 C7.1 C8.1 C9.2 C10.2 C11.2 C12.2 C13.2 C19.1 C22.1 C25.+ C33.1 CMPS12.6 D5.1 ESP82.1 F4.11 F4.19 F4.21 F4.28 F4.50 F4.75 F4.100 GY25.4 J1.4 LM1.2 R2.1 R15.2 RC.1 VL53.4
12V: 12V.1 A1.3 C24.+ C27.2 D6.1 L1.2 R10.2
CMPS12_RX_SCL: CMPS12.4 F4.47 F4.55
CMPS12_TX_SDA: CMPS12.5 F4.48 F4.56
"ESC Rx": F4.25
"ESC Tx": ESC.1 F4.26
"ESP82 RX": ESP82.8 F4.23
"ESP82 TX": ESP82.4 F4.24
"F407 NRST": C14.1 F4.14 R2.2 S1.1
"F407 SWCLK": F4.76 J1.2
"F407 SWDIO": F4.72 J1.3
F407_OSC_N: C16.1 F4.13 Y1.1
F407_OSC_P: C15.2 F4.12 Y1.2
GND: 12V.2 A1.1 C1.1 C2.1 C3.1 C4.1 C5.1 C6.1 C7.2 C8.2 C9.1 C10.1 C11.1 C12.1 C13.1 C14.2 C15.1 C16.2 C17.2 C18.2 C19.2 C22.2 C24.- C25.- C27.1 C28.1 C29.1 C31.2 C32.2 C33.2 CMPS12.1 D7.1 ESC.8 ESP82.5 F4.10 F4.20 F4.27 F4.74 F4.99 GY25.1 J1.1 J2.3 R3.2 R4.2 R5.2 R6.2 R7.2 R8.2 R9.2 R12.1 R13.1 R14.1 R16.1 RC.2 S1.2 U1.7 Vbat.2 VL53.1
"GY25 Rx": F4.80 GY25.3
"GY25 Tx": F4.83 GY25.2
Jetson_Uart_RX: J2.1
Jetson_Uart_TX: J2.2
LED1: D1.1 F4.96
LED2: D2.1 F4.95
LED3: D3.1 F4.43
LED4: D4.1 F4.44
NetC1_2: C1.2 C2.2 LM1.1 R1.1
NetC17_1: C17.1 F4.73
NetC18_1: C18.1 F4.49
NetC26_1: C26.1 D7.2 L1.1 U1.8
NetC26_2: C26.2 U1.1
NetC30_1: C30.1 C32.1 U1.6
NetC30_2: C30.2 R13.2
NetC31_1: C31.1 U1.4
NetCMPS12_3: CMPS12.3 R15.1 R16.2
NetD1_2: D1.2 R4.1
NetD2_2: D2.2 R5.1
NetD3_2: D3.2 R6.1
NetD4_2: D4.2 R7.1
NetD5_2: D5.2 R8.1
NetD6_2: D6.2 R9.1
NetF4_22: F4.22 R1.2
NetF4_94: F4.94 R3.1
NetR10_1: R10.1 R12.2 U1.5
NetR11_1: R11.1 R14.2 U1.3
"PWM MOTOR 1": ESC.3 F4.59
"PWM MOTOR 2": ESC.4 F4.60
"PWM MOTOR 3": ESC.5 F4.61
"PWM MOTOR 4": ESC.6 F4.62
"RC PWM INPUT 1": F4.30 RC.3
"RC PWM INPUT 2": F4.31 RC.4
VBAT+: C28.2 C29.2 R11.2 U1.2 Vbat.1
VL53_SCL: F4.92 VL53.3
VL53_SDA: F4.93 VL53.2
pads on no net: CMPS12.2 ESC.2 ESC.7 ESC.M ESP82.2 ESP82.3 ESP82.6 ESP82.7 F4.1 F4.2 F4.3 F4.4 F4.5 F4.6 F4.7 F4.8 F4.9 F4.15 F4.16 F4.17 F4.18 F4.29 F4.32 F4.33 F4.34 F4.35 F4.36 F4.37 F4.38 F4.39 F4.40 F4.41 F4.42 F4.45 F4.46 F4.51 F4.52 F4.53 F4.54 F4.57 F4.58 F4.63 F4.64 F4.65 F4.66 F4.67 F4.68 F4.69 F4.70 F4.71 F4.77 F4.78 F4.79 F4.81 F4.82 F4.84 F4.85 F4.86 F4.87 F4.88 F4.89 F4.90 F4.91 F4.97 F4.98 RC.M VL53.M
copper on no net:
  other v1: 46.464,3.536 40,41.15 13.591,41.97

## Polygon pours and split planes (outlines as drawn)
VBAT+ on Top Layer "VBAT+_L01_P008" (solid, remove dead copper, pour order 8): 10.44,17.05 10.35,16.96 10.35,11.16 9.83,10.64 9.83,1.82 9.97,1.68 11.3,1.68 11.46,1.84 11.46,9.77 11.81,10.12 11.81,12.98 11.33,13.46 11.33,16.91 11.19,17.05
NetC26_1 on Top Layer "NETC26_1_L01_P009" (solid, pour order 9): 9.154,20.3 10.14,20.3 10.14,34.26 4.66,34.26 4.66,23.64 9.154,23.64
12V on Top Layer "12V_L01_P010" (solid, pour order 10): 0.285,36.65 0.465,36.83 2.99,36.83 2.99,34.789 3.51,34.031 3.51,21.74 -0.12,21.74 -0.12,36.65
GND on Top Layer "GND_L01_P011" (solid, pour order 11): 6.23,35.46 6.58,35.11 9.9,35.11 9.94,35.07 10.43,34.58 10.43,20.03 10.38,19.98 6.77,19.98 6.77,22.25 6.42,22.6 4.5,22.6 4.17,22.27 4.17,20.78 0,20.78 0,-0.15 9.45,-0.15 9.45,14.95 7.48,14.95 7.3,15.13 7.3,16.37 8.42,16.37 9.37,17.32 14.18,17.32 14.18,13.44 15.08,12.54 15.08,7.94 18.17,7.94 18.17,20.04 12.09,20.04 11.64,20.04 11.61,20.07 11.61,23.59 12.09,24.07 12.09,35.27 10.49,36.87 3.52,36.87 3.29,36.64 3.29,35.46

## Keep-outs
Keep-Out Layer:
  the board outline again, w0.254

## Silkscreen, mask and mechanical layers (free items; w line width, h text height)
Top Overlay:
  circle w0.508: c3.536,3.536 r2.312
  circle w0.508: c46.464,46.464 r2.312
  circle w0.508: c3.536,46.464 r2.312
  circle w0.508: c46.464,3.536 r2.312
  lines w0.254: 78.52,66.41 78.52,78.41 93.52,78.41 93.52,66.41 78.52,66.41
Bottom Overlay:
  circle w0.508: c46.464,46.464 r2.312
  circle w0.508: c3.536,46.464 r2.312
  circle w0.508: c3.536,3.536 r2.312
  circle w0.508: c46.464,3.536 r2.312
  lines w0.254: 55.98,69.42 73.98,69.42 73.98,93.42 55.98,93.42 55.98,69.42 ; 62.22,44.55 76.22,44.55 76.22,68.55 62.22,68.55 62.22,44.55
Bottom 3D Body:
  lines w0.254: 25,9.75 25,25 40.25,25 40.25,9.75 25,9.75
Dimensions:
  lines w0.254: 9.75,25 25,25 ; 9.75,25 9.75,9.75 25,9.75 ; 9.75,25 9.75,40.25 25,40.25 ; 9.75,25 25,25 ; 25,9.75 25,25 ; 25,9.75 25,25 ; 25,9.75 40.25,9.75 40.25,25 ; 25,25 40.25,25 ; 25,25 40.25,25 ; 25,25 25,40.25 ; 25,25 25,40.25 ; 25,40.25 40.25,40.25 40.25,25